# Altium PCB Master - OLD.PcbDoc (part 3 of 3)
Units mm, origin at the board's own origin, x right, y up, seen from the top; angles counter-clockwise.
Board outline 154.8 x 60 mm, 4 copper layers (Top Layer, GND-Layer, PWR-Layer, Bottom Layer), stack 1.57 mm thick; 131 components, 96 nets, 448 pads, 522 vias.
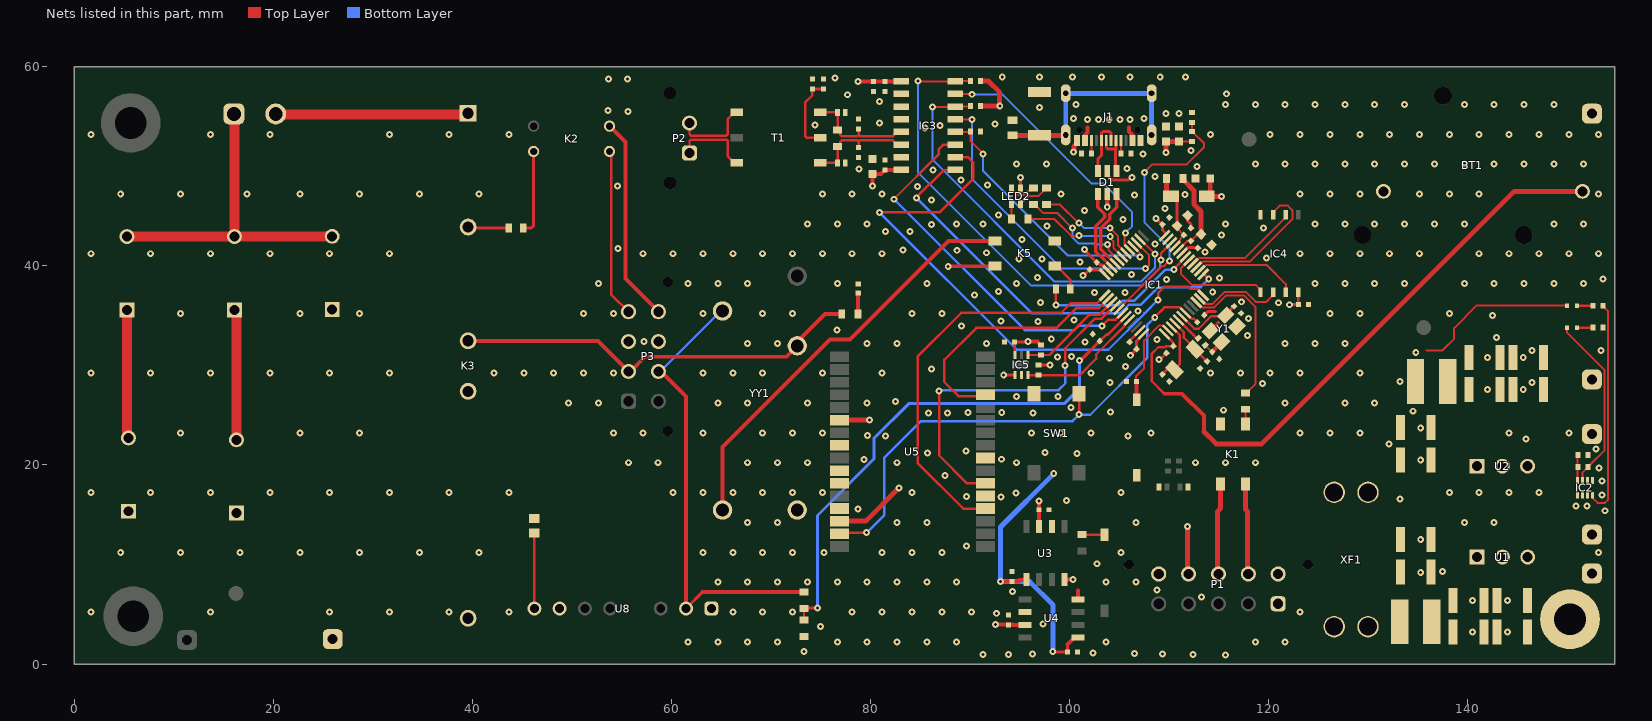
[diagram p4: the nets of this part, all layers, seen from the top]

## Via types
v1: diameter 0.7, hole 0.3, Top Layer to Bottom Layer, 522 vias

## Nets (pads, with @x,y where several pads share a name; then routed paths per layer and width w, separated by ;. In a path a pad name is that pad's centre, name@x,y a point inside that pad or via, vN(x,y) a via of type N, cw(c..) or ccw(c..) an arc to the next point about the centre after c; other vN are vias at no path point) (continued)
FLASH_IO0: IC1.17 IC4.5 | length 10.6
  Top Layer w0.2: IC1.17@112.027,40.566 111.2,39.739 111.2,39.2 112.3,38.1 118.7,38.1 119.074,37.726 119.074,37.469 IC4.5@119.199,37.344
FLASH_IO1: IC1.16 IC4.2 | length 11.5
  Top Layer w0.2: IC1.16@112.381,40.213 112.451,40.213 113.038,40.8 117.645,40.8 121.739,44.894 IC4.2@121.739,45.144
FLASH_IO2: IC1.15 IC4.3 | length 15.2
  Top Layer w0.2: IC1.15@112.734,39.859 112.805,39.859 113.396,40.45 118.15,40.45 122.4,44.7 122.4,45.6 121.95,46.05 121.125,46.05 120.469,45.394 IC4.3@120.469,45.144
FLASH_IO3: IC1.14 IC4.7 | length 10.5
  Top Layer w0.2: IC1.14@113.088,39.506 113.138,39.506 113.732,40.1 119.8,40.1 121.739,38.161 IC4.7@121.739,37.344
FLASH_SCK: IC1.11 IC4.6 | length 9.1
  Top Layer w0.2: IC1.11@113.088,36.694 113.609,36.173 113.751,36.173 113.753,36.17 114.37,36.17 115.6,37.4 117.7,37.4 118.7,36.4 119.8,36.4 120.344,36.944 120.344,37.219 IC4.6@120.469,37.344
GND: BT1.2 C1.1 C2.1 C3.1 C4.1 C5.1 C6.1 C7.1 C8.1 C9.1 C10.2 C11.1 C12.1 C13.1 C14.1 C15.1 C16.1 C17.1 C18.2 C19.1 C20.1 C21.1 C22.1 C23.1 C24.1 C25.2 C26.1 C27.1 C28.1 C29.1 C30.1 C31.1 C32.1 C33.1 C34.2 C35.1 C36.1 C37.1 C38.1 C39.1 C40.1 C41.1 C42.1 C43.1 C44.1 C47.1 D1.2 D2.2 D3.1 D4.1 D5.1 IC1.19 IC1.23 IC1.35 IC1.47 IC2.1 IC3.10 IC3.11 IC3.12 IC3.15 IC4.4 IC5.5 J1.A1/B12 J1.A12/B1 K1.2 K3.5 K5.2 LED4.1 P1.1 P1.10 P3.3 P3.7 pad.5@150.3,4.5 R5.1 R6.1 R12.1 R20.2 R21.1 R22.1 R24.1 R32.1 SW1.B1 SW3.2 TP4.1 U1.2 U2.2 U3.2 U3.8 U4.2 U4.8 U5.5 U5.8 U5.24 U5.26 U5.27 U5.29 U8.1 Y1.2 Y1.4 YY1.1 | length 16
  Top Layer w0.3: v1(101.5,41.65) 101.5,41.607 C26.1@102.754,40.353 102.859,40.353 103.133,40.08 103.338,40.08 IC1.35@103.912,39.506 ; C28.1@106.047,32.382 106.047,32.465 IC1.47@107.094,33.512 ; v1(109,30.6) 109.1,30.6 C29.1@109.746,31.247 ; IC1.19@111.32,41.273 111.894,41.848 112.718,41.848 112.766,41.8 C17.1@112.907,41.8 ; C10.2@111.884,45.084 111.884,44.516 112.207,44.193 C9.1@112.207,43.807 ; C1.1@113.554,35.053 113.9,35.4 114.7,35.4
  Top Layer w0.4: U3.8@99.5,8.5 v1@100.4,8.5 ; U4.8@100.85,6.48 100.85,7.375 ; Y1.4@114.156,33.488 114.954,34.285
  Top Layer w0.5: v1(100.4,51.45) 100.438,51.488 100.438,52.018 100.75,52.33 J1.A12/B1@100.75,52.6 ; v1(103.8,45.9) D1.2@103.8,47.25
  other v1: 115.7,0.9 91.325,0.95 93.875,0.975 112.425,0.975 96.275,1 109.375,1 106.55,1.075 102.35,1.1 73.325,1.25 61.675,2.225 64.675,2.225 67.675,2.225 70.675,2.225 76.675,2.225 79.675,2.225 82.675,2.225 85.675,2.225 88.675,2.225 103.675,2.225 118.675,2.225 121.675,2.225 140.5,3.2 144,3.2 75,3.775 97.325,4.025 92.65,5.1 66.175,5.225 69.175,5.225 72.175,5.225 78.175,5.225 81.175,5.225 84.175,5.225 87.175,5.225 90.175,5.225 123.175,5.225 140.5,6.4 144,6.4 113.25,6.725 94.275,7.275 108.8,7.425 64.675,8.225 67.675,8.225 70.675,8.225 73.675,8.225 76.675,8.225 79.675,8.225 82.675,8.225 85.675,8.225 88.675,8.225 103.675,8.225 106.675,8.225 100.345,8.5 135.3,9.2 137.5,9.3 102.775,10.075 63.175,11.225 66.175,11.225 69.175,11.225 72.175,11.225 75.325,11.225 81.175,11.225 84.175,11.225 87.175,11.225 105.175,11.225 153.175,11.225 89.675,11.875 135.3,12.5 67.675,14.225 70.675,14.225 82.675,14.225 85.675,14.225 106.675,14.225 139.675,14.225 142.675,14.225 153.8,15.4 78.775,15.575 99.725,16.425 93.125,16.8 89.65,16.85 94.65,17.2 60.175,17.225 63.175,17.225 66.175,17.225 69.175,17.225 72.175,17.225 75.175,17.225 84.175,17.225 105.175,17.225 138.175,17.225 141.175,17.225 144.175,17.225 147.175,17.225 87.475,18.925 153.2,19.7 55.675,20.225 58.675,20.225 67.675,20.225 70.675,20.225 73.675,20.225 82.675,20.225 94.675,20.225 112.675,20.225 115.675,20.225 118.675,20.225 135.3,20.5 79.364,20.536 93.175,20.575 100.775,21.175 85.75,21.225 97.55,21.25 89.6,21.425 152.9,21.6 81.51,22.89 105.875,22.925 79.7,22.975 54.175,23.225 57.175,23.225 63.175,23.225 69.175,23.225 72.175,23.225 75.175,23.225 96.175,23.225 99.175,23.225 102.175,23.225 108.175,23.225 123.175,23.225 126.175,23.225 129.175,23.225 144.175,23.225 150.175,23.225 135.3,23.7 87.75,25.2 96.325,25.2 85.85,25.225 89.825,25.25 93.2,25.25 104.15,25.3 115.5,25.5 100.175,25.775 49.675,26.225 52.675,26.225 64.675,26.225 67.675,26.225 73.675,26.225 79.675,26.225 121.675,26.225 127.675,26.225 130.675,26.225 82.506,26.394 98.875,26.875 94.675,26.899 142,27.6 145.6,27.6 119.4,28.2 104.075,28.275 42.175,29.225 45.175,29.225 48.175,29.225 51.175,29.225 54.175,29.225 63.175,29.225 66.175,29.225 69.175,29.225 75.175,29.225 81.175,29.225 102.175,29.225 114.175,29.225 117.175,29.225 120.175,29.225 123.175,29.225 129.175,29.225 86.125,29.65 105.625,29.9 104.05,30.725 142,30.8 145.6,30.8 98.825,30.85 100.225,30.9 153.4,31.5 67.675,32.225 70.675,32.225 79.675,32.225 82.675,32.225 91.675,32.225 121.675,32.225 124.675,32.225 127.675,32.225 101.55,32.375 57.25,32.425 108.8,32.6 98.175,32.65 142.9,32.8 117.9,33 76.65,33.55 89.175,33.975 96.825,34.425 93.125,34.45 100.475,34.55 118,34.7 142.5,35 51.175,35.225 54.175,35.225 63.175,35.225 69.175,35.225 72.175,35.225 84.175,35.225 87.175,35.225 120.175,35.225 126.175,35.225 129.175,35.225 138.175,35.225 106.903,35.458 121,36.3 97.075,36.325 117.3,36.4 90.475,37.1 102.525,37.325 105.575,37.35 114.4,37.375 92.875,37.45 52.675,38.225 61.675,38.225 64.675,38.225 67.675,38.225 76.675,38.225 85.675,38.225 94.675,38.225 124.675,38.225 127.675,38.225 130.675,38.225 133.675,38.225 139.675,38.225 142.675,38.225 145.675,38.225 148.675,38.225 151.675,38.225 109.775,38.65 153.6,38.7 115.1,38.8 96.8,38.825 106.25,39.12 101.075,40.4 94.95,40.675 97.225,40.7 119.8,40.8 57.175,41.225 60.175,41.225 63.175,41.225 66.175,41.225 69.175,41.225 72.175,41.225 75.175,41.225 78.175,41.225 81.175,41.225 123.175,41.225 126.175,41.225 129.175,41.225 132.175,41.225 135.175,41.225 141.175,41.225 144.175,41.225 147.175,41.225 150.175,41.225 153.175,41.225 91.65,41.325 113.6,41.4 88.7,41.575 83.3,41.6 54.625,41.775 108.6,42.2 95.25,42.675 115.3,43.1 81.5,43.45 84,43.475 119.5,43.8 97.724,44.024 86.15,44.15 91.3,44.2 73.675,44.225 76.675,44.225 79.675,44.225 88.675,44.225 115.675,44.225 124.675,44.225 127.675,44.225 130.675,44.225 133.675,44.225 136.675,44.225 139.675,44.225 148.675,44.225 151.675,44.225 105.4,44.65 92.85,45.1 101.5,45.55 109.6,45.75 86.15,46.625 106.55,47.15 111.6,47.2 75.175,47.225 78.175,47.225 81.175,47.225 99.175,47.225 123.175,47.225 126.175,47.225 129.175,47.225 135.175,47.225 138.175,47.225 141.175,47.225 153.175,47.225 84.725,48 54.577,48.05 91.75,48.125 89.124,48.649 108.6,49 86.3,49.625 78.875,49.75 105.8,49.8 112.8,49.975 94.675,50.225 97.675,50.225 118.675,50.225 121.675,50.225 124.675,50.225 127.675,50.225 130.675,50.225 133.675,50.225 136.675,50.225 139.675,50.225 142.675,50.225 145.675,50.225 148.675,50.225 151.675,50.225 107.4,51.225 112.2,51.6 114.175,53.225 120.175,53.225 123.175,53.225 126.175,53.225 129.175,53.225 132.175,53.225 135.175,53.225 138.175,53.225 141.175,53.225 144.175,53.225 147.175,53.225 150.175,53.225 153.175,53.225 85.475,53.875 87,54.1 74.425,54.15 92.525,54.25 80.925,54.375 100.4,54.8 107.5,54.8 109.7,55.3 111,55.3 55.65,55.5 53.65,55.6 97,55.9 100.675,56.225 115.675,56.225 118.675,56.225 121.675,56.225 124.675,56.225 127.675,56.225 130.675,56.225 133.675,56.225 139.675,56.225 142.675,56.225 145.675,56.225 148.675,56.225 80.9,56.5 77.7,57.2 115.8,57.3 53.7,58.8 55.6,58.8 76.425,58.875 111.65,58.975 93.25,59 97,59 100.3,59 103.2,59 106.1,59 109.125,59
GND_HV: K3.7 R25.2 RT3.1 RT4.1 RT5.1 TP7.1 U8.7
  other v1: 1.675,5.225 13.675,5.225 25.675,5.225 31.675,5.225 37.675,5.225 43.675,5.225 4.675,11.225 10.675,11.225 16.675,11.225 22.675,11.225 28.675,11.225 34.675,11.225 40.675,11.225 1.675,17.225 7.675,17.225 13.675,17.225 19.675,17.225 25.675,17.225 31.675,17.225 37.675,17.225 43.675,17.225 10.675,23.225 22.675,23.225 28.675,23.225 1.675,29.225 7.675,29.225 13.675,29.225 19.675,29.225 25.675,29.225 31.675,29.225 10.675,35.225 22.675,35.225 28.675,35.225 1.675,41.225 7.675,41.225 13.675,41.225 19.675,41.225 25.675,41.225 31.675,41.225 4.675,47.225 10.675,47.225 17.35,47.225 22.675,47.225 28.675,47.225 34.675,47.225 40.675,47.225 1.675,53.225 13.675,53.225 19.675,53.225 31.675,53.225 37.675,53.225 43.675,53.225
HSE_OSC_IN: IC1.5 R1.1 | length 2.7
  Top Layer w0.25: IC1.5@110.966,34.573 112.786,32.754 R1.1@112.946,32.754
HSE_OSC_OUT: C3.2 IC1.6 Y1.3 | length 6.7
  Top Layer w0.25: IC1.6@111.32,34.927 112.554,33.692 112.992,33.692 114.255,34.955 115.624,34.955 Y1.3@115.712,35.044 Y1.3@115.712,35.119
  Top Layer w0.3: Y1.3@115.712,35.119 C3.2@116.546,35.954
I2C_SCL: IC1.39 IC5.1 R29.1 | length 10.6
  Top Layer w0.25: IC5.1@95.825,31.05 97.15,31.05 97.984,31.05 102.034,35.1 103.025,35.1 IC1.39@104.266,36.341
I2C_SDA: IC1.44 IC5.6 R30.1 | length 12.8
  Top Layer w0.25: IC5.6@95.825,29.05 95.85,29.025 R30.1@96.9,29.025 ; R30.1@96.9,29 101,29 102.695,30.695 102.695,31.128 105.55,33.983 105.55,34.054 106.034,34.538 IC1.44@106.034,34.573
ISO_RELAY+: K1.4 P1.7 | length 9.1
  Top Layer w0.5: K1.4@117.7,18.1 117.7,15.54 117.89,15.35 P1.7@117.89,9.05
ISO_RELAY-: K1.3 P1.8 | length 9.2
  Top Layer w0.5: P1.8@114.89,9.05 114.89,15.35 115.16,15.62 K1.3@115.16,18.1
LED_B: IC1.32 R19.1 | length 11.7
  Top Layer w0.2: R19.1@96.4,46.173 96.5,46.173 97.373,45.3 98.8,45.3 v1(100.3,43.8) ; v1(103.823,42.146) 103.918,42.051 103.918,41.621 IC1.32@104.973,40.566
  Bottom Layer w0.2: v1(100.3,43.8) 100.3,42.9 100.95,42.25 102.419,42.25 102.523,42.146 v1(103.823,42.146)
LED_G: IC1.31 R18.1 | length 11.6
  Top Layer w0.2: R18.1@95.827,44.7 98.5,44.7 100.221,42.979 100.879,42.979 v1(100.974,43.074) ; v1(104.101,42.949) 104.101,42.814 104.423,42.493 104.423,41.824 IC1.31@105.327,40.92
  Bottom Layer w0.2: v1(100.974,43.074) 101.037,43.012 104.039,43.012 v1(104.101,42.949)
LED_R: IC1.30 R17.1 | length 10.6
  Top Layer w0.2: R17.1@97.7,46.173 99.027,46.173 100.869,44.331 v1(100.964,44.331) ; v1(104.1,43.799) 104.9,42.999 104.9,42.054 IC1.30@105.68,41.273
  Bottom Layer w0.2: v1(100.964,44.331) 101.495,43.799 v1(104.1,43.799)
LSE_OSC_IN: C4.2 IC1.3 Y2.1 | length 6.1
  Top Layer w0.25: Y2.1@110.184,29.999 Y2.1@110.408,29.999 ; IC1.3@110.259,33.866 111.082,33.043 111.082,30.143 110.55,29.611 Y2.1@110.55,29.575
  Top Layer w0.3: C4.2@109.464,29.254 Y2.1@110.209,29.999
LSE_OSC_OUT: C5.2 IC1.4 Y2.2 | length 5.1
  Top Layer w0.25: IC1.4@110.613,34.219 111.491,33.341 111.491,32.795 112.6,31.686 Y2.2@112.6,31.625
  Top Layer w0.3: Y2.2@112.6,31.625 C5.2@113.825,30.4
MC_EN: IC1.28 IC3.4 R12.2 | length 26.8
  Top Layer w0.2: IC3.4@88.524,53.47 90.045,53.47 R12.2@90.075,53.5 90.075,52.509 v1(91.333,51.251) ; IC1.28@106.387,41.981 107.05,41.318 107.05,40.925 v1(107.1,40.875)
  Bottom Layer w0.2: v1(91.333,51.251) 91.31,51.228 91.31,49.59 99.85,41.05 106.79,41.05 106.965,40.875 v1(107.1,40.875)
MC_INT: IC1.22 IC3.8 R9.1 | length 47.3
  Top Layer w0.2: v1(84.775,58.599) 84.824,58.55 IC3.8@88.524,58.55 88.549,58.575 R9.1@90.05,58.575 ; v1(109.2,40.611) 109.2,41.275 IC1.22@110.259,42.334
  Bottom Layer w0.2: v1(84.775,58.599) 84.775,49.425 96.175,38.025 107.288,38.025 109.105,39.841 109.105,40.516 v1(109.2,40.611)
MC_RX_MOSI: IC1.29 IC3.7 | length 27
  Top Layer w0.2: IC3.7@88.524,57.28 90.17,57.28 v1(90.2,57.25) ; v1(105.625,43.325) 105.625,43.19 105.51,43.074 105.51,42.222 106.034,41.698 IC1.29@106.034,41.627
  Bottom Layer w0.2: v1(90.2,57.25) 93.25,57.25 102.2,48.3 103.4,48.3 106.302,45.398 106.302,44.002 v1(105.625,43.325)
MC_RX_NSS: IC1.26 IC3.6 R10.1 | length 40.6
  Top Layer w0.2: v1(86.25,55.975) 88.489,55.975 88.541,56.027 90.023,56.027 R10.1@90.05,56 ; IC1.26@107.094,42.688 108.572,41.21 v1(108.597,41.21)
  Bottom Layer w0.2: v1(86.25,55.975) 86.25,50.675 98.5,38.425 107.193,38.425 108.6,39.832 108.6,41.207 v1(108.597,41.21)
MC_RX_SCK: IC1.27 IC3.5 | length 32.1
  Top Layer w0.2: IC3.5@88.524,54.74 89.287,54.74 89.302,54.725 v1(90.2,54.725) ; IC1.27@106.741,42.334 108,41.075 108,40.087 107.639,39.726 v1(107.639,39.72)
  Bottom Layer w0.2: v1(90.2,54.725) 90.2,48.75 99.23,39.72 v1(107.639,39.72)
MC_TX_MOSI: IC1.42 IC3.3 | length 37.9
  Top Layer w0.25: v1(82.35,46.7) 86.85,51.2 86.85,51.7 87.35,52.2 IC3.3@88.524,52.2 ; v1(103.275,33.975) 103.9,34.6 104.646,34.6 IC1.42@105.327,35.28
  Bottom Layer w0.25: v1(82.35,46.7) 82.375,46.7 95.525,33.55 100.484,33.55 100.909,33.975 v1(103.275,33.975)
MC_TX_NSS: IC1.12 IC3.2 | length 56.1
  Top Layer w0.25: v1(80.925,45.375) 86.95,45.375 90.325,48.75 90.325,50.404 89.799,50.93 IC3.2@88.524,50.93 ; v1(108.9,36.6) 108.941,36.641 108.941,37.325 109.541,37.925 111.945,37.925 112.145,37.725 112.764,37.725 IC1.12@113.441,37.048
  Bottom Layer w0.25: v1(80.925,45.375) 94.725,31.575 103.903,31.575 107.528,35.2 107.528,35.228 v1(108.9,36.6)
MC_TX_SCK: IC1.13 IC3.1 | length 41.5
  Top Layer w0.25: v1(84.65,46.824) 84.65,46.925 87.333,49.608 88.472,49.608 IC3.1@88.524,49.66 ; IC1.13@113.441,39.152 113.477,39.188 113.512,39.188 v1(114,38.7)
  Bottom Layer w0.25: v1(84.65,46.824) 96.249,35.225 105.1,35.225 105.958,36.083 107.158,36.083 108.95,37.875 113.175,37.875 v1(114,38.7)
NetC8_2: C8.2 J1.Shell R6.2 | length 22.3
  Top Layer w0.5: R6.2@94.325,53.125 99.585,53.125 J1.Shell@99.63,53.17
  Bottom Layer w0.5: J1.Shell@99.63,53.17 J1.Shell@99.63,57.35 J1.Shell@108.27,57.35 J1.Shell@108.27,53.17
NetC13_2: C13.2 C14.2 L1.2 U1.1
NetC21_2: C21.2 C22.2 L2.2 U2.1
NetC35_2: C35.2 C36.2 T1.5 | length 7.7
  Top Layer w0.25: C36.2@74.175,57.8 74.175,57.153 73.45,56.428 73.45,53.046 73.596,52.9 T1.5@74.965,52.9
  Top Layer w0.3: C36.2@74.175,57.8 C35.2@75.275,57.8
NetD1_4: D1.4 J1.A7 J1.B7 | length 4.8
  Top Layer w0.3: J1.A7@103.7,52.6 103.7,51.906 103.876,51.73 104.644,51.73 104.65,51.724 ; J1.B7@104.7,52.6 104.7,51.774 104.65,51.724 ; D1.4@104.75,49.55 104.65,49.65 104.65,51.724
NetD1_6: D1.6 J1.A6 J1.B6 | length 5.8
  Top Layer w0.3: D1.6@102.85,49.55 102.85,50.75 103.2,51.1 103.2,53.324 103.376,53.5 104.024,53.5 104.2,53.324 J1.A6@104.2,52.6
NetJ1_A5: J1.A5 R5.2 | length 1.3
  Top Layer w0.2: R5.2@105.2,51.3 J1.A5@105.2,52.6
NetJ1_B5: J1.B5 R21.2 | length 1.3
  Top Layer w0.2: R21.2@102.2,51.3 J1.B5@102.2,52.6
NetK1_1: K1.1 R14.2 | length 1.5
  Top Layer w0.2: K1.1@117.7,24.1 R14.2@117.7,25.6
NetK2_2: K2.2 R26.1 | length 8.6
  Top Layer w0.3: R26.1@45.1,43.825 45.954,43.825 46.165,44.036 K2.2@46.165,51.505
NetK3_2: K3.2 R26.2 | length 4.1
  Top Layer w0.3: K3.2@39.577,43.908 K3.2@39.575,43.91 39.66,43.825 R26.2@43.65,43.825
NetK5_1: K5.1 R28.2 | length 3
  Top Layer w0.25: K5.1@98.525,39.98 98.725,39.98 100.1,38.605 R28.2@100.1,37.7
NetLED1_1: LED1.1 R8.2 | length 1.6
  Top Layer w0.25: LED1.1@151,36 R8.2@152.6,36
NetLED2_1: LED2.1 R17.2 | length 3.5
  Top Layer w0.2: LED2.1@95.1,46.2 95.1,46.35 95.25,46.5 95.4,46.5 95.938,47.038 96.912,47.038 R17.2@97.7,47.827 R17.2@97.8,47.827
NetLED2_2: LED2.2 R18.2 | length 1.3
  Top Layer w0.2: R18.2@94.173,44.9 94.2,44.927 LED2.2@94.2,46.2
NetLED2_3: LED2.3 R19.2 | length 2.8
  Top Layer w0.2: LED2.3@94.2,47.8 94.2,47.65 94.35,47.5 94.396,47.5 94.746,47.15 95.5,47.15 95.927,47.577 96.15,47.577 R19.2@96.4,47.827
NetLED3_1: LED3.1 R22.2 | length 1.6
  Top Layer w0.25: LED3.1@151,33.8 R22.2@152.6,33.8
NetLED4_2: LED4.2 R31.1 | length 2.1
  Top Layer w0.4: R31.1@78.775,35.15 LED4.2@78.775,37.27
NetR13_2: R13.2 SW2.1 | length 2.3
  Top Layer w0.248: R13.2@101.25,12.927 101.308,12.985 SW2.1@103.525,12.985
NetR25_1: R25.1 U8.8 | length 7.6
  Top Layer w0.25: U8.8@46.235,5.575 R25.1@46.235,13.15
NetRT1_1: RT1.1 RT4.2 | length 12.9
  Top Layer w1: RT4.2@16.3,22.529 RT1.1@16.3,35.388
NetRT2_1: RT2.1 RT5.2 | length 12.7
  Top Layer w1: RT5.2@5.3,22.867 RT2.1@5.3,35.584
NRST: C1.2 IC1.7 SW1.A1 U5.31 | length 54
  Top Layer w0.25: U5.31@76.305,13.201 79.576,13.201 v1(79.6,13.225) ; SW1.A1@100.95,27.175 100.975,27.15 v1(100.975,25.05) ; v1(108.575,34.825) 108.575,34.853 109.551,35.829 111.089,35.829 111.638,35.28 111.709,35.28 112.289,34.7 112.493,34.7 C1.2@112.846,34.346
  Bottom Layer w0.25: v1(79.6,13.225) 79.675,13.225 81.375,14.925 81.375,20.7 85.075,24.4 100.325,24.4 v1(100.975,25.05) 102.089,25.05 107.8,30.761 107.8,34.05 v1(108.575,34.825)
p3v3: C23.2 C24.2 C25.1 C26.2 C27.2 C28.2 C30.2 C31.2 C38.2 C40.2 C42.2 C43.2 FB1.1 IC1.24 IC1.36 IC1.48 IC3.9 IC4.8 IC5.3 IC5.4 P1.9 R9.2 R10.2 R29.2 R30.2 TP3.1 U2.3 U3.5 U4.5 U5.30 | length 72.1
  Top Layer w0.25: IC5.3@94.525,31.05 C43.2@94.525,32.325 ; C42.2@123.009,36.228 IC4.8@123.009,37.344
  Top Layer w0.3: v1(93.4,29.025) 93.413,29.038 94.525,29.038 IC5.4@94.525,29.05 ; C43.2@94.525,32.325 C43.2@94.475,32.375 95.8,32.375 v1(95.825,32.4) ; R30.2@96.9,30.025 98.025,30.025 v1(98.05,30.05) ; R29.2@97,32.174 97,32.1 R29.2@97.175,32.1 ; v1@98.35,1.225 C40.2@99.775,1.225 ; C40.2@99.8,1.175 99.8,1.97 ; v1(101.35,39.025) 101.388,39.025 102.009,39.646 C26.2@102.046,39.646 ; C26.2@102.188,39.646 102.234,39.6 103.111,39.6 IC1.36@103.559,39.152 ; v1(106.117,31.024) 106.131,31.024 C28.2@106.754,31.646 106.754,32.465 IC1.48@107.448,33.159 ; v1(108.7,44.75) 108.734,44.75 109.313,44.171 C27.2@109.346,44.171 109.346,43.606 109.732,43.221 IC1.24@109.552,43.041 ; v1(122.1,36.1) 122.144,36.144 C42.2@123.004,36.144
  Top Layer w0.4: v1(78.75,58.55) 80.075,58.55 ; C30.2@80.325,58.55 C31.2@81.475,58.55 82.337,58.55 IC3.9@83.1,58.55 ; v1@93.1,8.3 C38.2@94.25,8.3 94.875,8.3 95.004,8.429 95.574,8.429 U3.5@95.67,8.525 ; v1(95.825,32.4) 96.774,32.4 R29.2@97,32.174 ; v1(98.325,1.25) v1@98.35,1.225 ; C40.2@99.775,1.225 C40.2@99.8,1.2 ; 99.8,1.97 100.4,2.57 100.5,2.67 U4.5@100.85,2.67
  Top Layer w0.5: U5.30@76.91,14.35 79.525,14.35 v1(82.875,17.7) ; C30.2@80.075,58.55 C30.2@80.325,58.55 ; R10.2@91.05,56.05 v1(93,56.05) 92.985,56.065 92.985,57.44 91.85,58.575 R9.2@91.05,58.575 ; P1.9@111.87,9.05 v1(111.875,13.825) ; C25.1@114.15,48.8 114.15,47.35 FB1.1@113.8,47 v1(115.3,47)
  Bottom Layer w0.5: v1@98.363,1.149 98.363,5.937 96.025,8.275 v1(93.075,8.275) 93.075,13.775 v1(98.425,19.125)
  other v1: 145.9,22.6 146.5,28.3 146.5,31.5
p3v3A: C9.2 C10.1 FB1.2 IC1.21 R7.2 | length 8
  Top Layer w0.2: IC1.21@110.613,41.981 110.613,42.051 111.182,42.62 111.182,42.782 C9.2@111.5,43.1 110.823,43.777 C10.1@110.823,44.023
  Top Layer w0.3: FB1.2@110.2,47 110.373,47 110.823,46.55 C10.1@110.823,44.023
  Top Layer w0.5: R7.2@109.773,48.8 109.773,47.35 FB1.2@110.123,47
p3v3Ref: C17.2 C18.1 IC1.20 R7.1 | length 9.3
  Top Layer w0.2: IC1.20@110.966,41.627 111.847,42.507 C17.2@112.2,42.507 112.877,43.184 C18.1@113.223,43.184
  Top Layer w0.5: R7.1@111.427,48.8 111.527,48.7 111.527,48.557 112.5,47.584 112.5,46.2 113.223,45.477 C18.1@113.223,43.184
p5v0: C19.2 C20.2 C32.2 C33.2 C39.2 IC2.2 IC2.7 IC3.16 K5.4 L2.1 LED1.2 LED2.4 TP2.1 U3.3 | length 29.2
  Top Layer w0.2: K5.4@92.497,39.952 K5.4@92.525,39.98 ; 135.856,31.5 137.45,31.5 138.65,32.7 138.65,33.75 140.9,36 LED1.2@150,36
  Top Layer w0.3: v1(95.075,48.875) 95.087,48.863 95.087,47.813 LED2.4@95.1,47.8
  Top Layer w0.35: v1(87.823,39.952) K5.4@92.497,39.952
  Top Layer w0.4: v1(80.2,48.05) 80.2,48.825 80.225,48.85 C33.2@80.225,49.25 81.075,49.25 C32.2@81.475,49.65 ; C32.2@81.485,49.66 IC3.16@83.1,49.66 ; v1(96.925,16.4) 96.937,16.388 96.937,15.312 C39.2@96.95,15.3 ; U3.3@96.94,13.825 C39.2@96.94,15.29
  other v1: 133.2,16.6 153.5,17 153.5,18.4 132.1,22.1 134.5,25.4 133.2,28.4 134.8,31.3
p5v0_PS: C15.2 C16.2 IC2.3 IC2.5 LED3.2 R23.2 U1.3 | length 17.8
  Top Layer w0.2: LED3.2@150,33.8 150,33.3 153.75,29.55 153.75,21.45 152.3,20 152.25,20 152.1,19.85 152.1,19.75 151.55,19.2 IC2.3@151.55,18.538
p5v0_ST: C41.2 U4.3 U5.22 | length 6
  Top Layer w0.4: v1(92.575,3.95) 94.05,3.95 94.3,3.95 94.31,3.94 U4.3@95.55,3.94
  Top Layer w0.5: U5.22@76.91,24.51 79.91,24.51 v1(79.925,24.525)
p5v0_USB: C6.2 C7.2 D1.5 IC2.6 J1.A4/B9 J1.A9/B4 R4.1 TP5.1 | length 9.8
  Top Layer w0.2: C6.2@111,52.5 112,52.5 R4.1@112.3,52.5
  Top Layer w0.3: D1.5@103.8,49.55 103.95,49.4 103.95,48.95 104.25,48.65 105.942,48.65 106.192,48.9 v1(106.3,48.9)
  Top Layer w0.4: J1.A9/B4@101.55,52.6 101.55,53.17 101.8,53.42 101.8,53.9 ; 106,53.9 106,53.52 106.35,53.17 J1.A4/B9@106.35,52.6
  Top Layer w0.5: v1(109.7,51.4) C7.2@109.7,52.5 C6.2@111,52.5
  other v1: 150.9,15.9 152,15.9 101.8,54.7 102.9,54.7 104,54.7 105.1,54.7 106.1,54.7
p24v0: C11.2 C12.2 L1.1 TP1.1 XF1.3 XF1.4
pBat: BT1.1 C29.2 IC1.1 | length 64.2
  Top Layer w0.25: 109.55,27.15 108.286,28.414 108.286,31.186 108.925,31.825 109.582,31.825 109.633,31.875 109.651,31.875 109.729,31.954 C29.2@110.454,31.954 110.454,32.257 IC1.1@109.552,33.159
  Top Layer w0.35: 109.55,27.15 111.325,27.15
  Top Layer w0.4: 111.325,27.15 113.525,24.95 113.525,23.35
  Top Layer w0.5: 113.525,23.35 114.75,22.125 119.325,22.125 144.7,47.5 BT1.1@151.55,47.5
PC_Mech_State: K2.3 P3.4 | length 17
  Top Layer w0.254: K2.3@53.785,51.505 53.95,51.34 53.95,37.15 P3.4@55.775,35.325
PC_SIG: K3.3 P3.2 R31.2 YY1.2 | length 41.4
  Top Layer w0.254: P3.2@55.7,29.4 P3.2@55.9,29.4 ; YY1.2@72.672,31.953 YY1.2@72.672,32.386
  Top Layer w0.4: K3.3@39.575,32.48 52.62,32.48 P3.2@55.7,29.4 ; P3.2@55.9,29.4 57.375,30.875 71.55,30.875 YY1.2@72.65,31.975 ; YY1.2@72.672,32.386 75.436,35.15 R31.2@77.123,35.15
PCC_ACT: IC1.18 R28.1 | length 16.8
  Top Layer w0.25: v1(98.65,36.075) R28.1@98.65,37.7 ; v1(110.499,39.633) 110.499,39.71 111.673,40.885 IC1.18@111.673,40.92
  Bottom Layer w0.25: v1(98.65,36.075) 98.7,36.025 104.875,36.025 105.333,36.483 106.508,36.483 109.658,39.633 v1(110.499,39.633)
PCC_COIL+: K5.3 YY1.5 | length 42.3
  Top Layer w0.4: YY1.5@65.15,15.475 65.15,21.825 75.925,32.6 77.934,32.6 87.854,42.52 K5.3@92.525,42.52
PR1: IC2.4 R23.1 R24.2 | length 2.5
  Top Layer w0.2: IC2.4@151.05,18.538 151.05,20.95 R24.2@151.1,21
pVin: P1.6 XF1.1 XF1.2
RDTX_N: C37.2 D3.2 IC3.13 R11.1 T1.6 | length 11.2
  Top Layer w0.25: T1.6@74.98,55.425 D3.2@76.675,55.425 ; D3.2@76.6,55.425 76.7,55.325 R11.1@76.7,53.652 76.752,53.652 76.977,53.427 76.977,53.171 77.123,53.025 77.722,53.025 78.666,53.025 78.813,53.171 ; C37.2@78.8,53.75 78.813,53.737 78.813,53.171 ; IC3.13@83.1,53.47 82.663,53.47 82.218,53.025 78.913,53.025 78.913,53.071 78.813,53.171
RDTX_P: C34.1 D2.1 IC3.14 R11.2 T1.4 | length 11.1
  Top Layer w0.25: T1.4@74.975,50.35 D2.1@76.675,50.35 76.7,50.375 R11.2@76.7,51.998 76.752,51.998 76.977,52.223 76.977,52.479 77.123,52.625 77.556,52.625 78.666,52.625 78.813,52.479 ; C34.1@78.825,51.9 78.813,51.912 78.813,52.479 ; IC3.14@83.1,52.2 82.663,52.2 82.238,52.625 78.913,52.625 78.813,52.525 78.813,52.479
RELAY: IC1.10 R14.1 | length 16.3
  Top Layer w0.2: IC1.10@112.734,36.341 113.256,35.819 113.397,35.819 113.4,35.817 114.512,35.817 115.745,37.05 117.5,37.05 118.7,35.85 118.7,28.154 117.8,27.254 R14.1@117.7,27.254
SDC: P3.6 R33.2 U8.2 YY1.4 | length 46.8
  Top Layer w0.3: U8.2@61.475,5.575 63.152,7.252
  Top Layer w0.4: P3.6@58.7,29.4 58.95,29.4 61.475,26.875 U8.2@61.475,5.575 ; 63.152,7.252 R33.2@73.325,7.252
  Bottom Layer w0.254: P3.6@58.7,29.4 P3.6@58.887,29.4 ; P3.6@59.075,29.4 P3.6@58.887,29.4 ; YY1.4@65.15,35.475 64.963,35.475 P3.6@58.887,29.4
SDC_PCC: C44.2 IC1.43 R32.2 R33.1 | length 54
  Top Layer w0.2: R32.2@73.325,4.4 R33.1@73.325,5.598
  Top Layer w0.3: R33.1@73.325,5.598 73.351,5.624 74.649,5.624 v1(74.675,5.65) ; v1(101,30.475) 101.082,30.475 C44.2@103.054,32.446 103.729,33.121 103.875,33.121 IC1.43@105.68,34.927
  Bottom Layer w0.3: v1(74.675,5.65) 74.675,14.928 80.35,20.603 80.35,22.65 83.9,26.2 99.525,26.2 101,27.675 v1(101,30.475)
ST: IC2.8 R8.1 | length 21.8
  Top Layer w0.2: IC2.8@152.55,16.862 152.6,16.812 152.6,16.675 153.075,16.2 153.8,16.2 154.125,16.525 154.125,35.425 153.6,35.95 R8.1@153.6,36
SW1_IN: C47.2 IC1.2 SW3.1 | length 9.2
  Top Layer w0.2: C47.2@106.725,28.4 106.7,28.425 106.7,28.941 107.499,29.74 107.499,32.502 109.033,34.036 109.382,34.036 IC1.2@109.906,33.512
  Top Layer w0.4: SW3.1@106.725,26.935 C47.2@106.725,28.4
SWCLK: IC1.38 U5.13 | length 25.5
  Top Layer w0.25: U5.13@90.945,27.171 90.945,27.145 90.725,26.925 89.75,26.925 88.85,26.925 87.425,28.35 87.425,30.55 90.65,33.775 98.7,33.775 100.65,35.725 102.95,35.725 103.391,36.166 103.391,36.173 IC1.38@103.912,36.694
SWDIO: IC1.37 U5.4 | length 40.8
  Top Layer w0.25: U5.4@91.55,15.62 89.33,15.62 84.75,20.2 84.75,30.9 89.15,35.3 99.175,35.3 100.125,36.25 102.761,36.25 IC1.37@103.559,37.048
SWO: IC1.40 U5.6 | length 37.2
  Top Layer w0.25: v1(86.9,27.45) 86.9,20.975 89.725,18.15 92.026,18.15 91.895,18.281 U5.6@90.945,18.281 ; v1(99.576,30.017) 99.576,31.726 102.55,34.7 103.226,34.7 104.03,35.504 104.1,35.504 104.584,35.987 IC1.40@104.619,35.987
  Bottom Layer w0.25: v1(86.9,27.45) 86.974,27.524 98.903,27.524 99.576,28.198 99.576,29.325 v1(99.576,30.017)
TPL_N: P2.2 T1.1 | length 7.8
  Top Layer w0.247: P2.2@61.825,54.35 61.825,53.243 61.97,53.098 62.701,53.098 65.532,53.098 65.677,53.243 65.677,54.786 66.33,55.44 T1.1@66.585,55.44
TPL_P: P2.1 T1.3 | length 7.9
  Top Layer w0.247: P2.1@61.825,51.35 61.825,52.557 61.97,52.701 62.866,52.701 65.532,52.701 65.677,52.557 65.677,51.014 66.33,50.36 T1.3@66.585,50.36
TS-: P4.1 RT1.2 RT2.2 RT3.2 | length 32.9
  Top Layer w1: RT2.2@5.3,42.95 15.975,42.95 16.35,42.95 RT3.2@25.896,42.95 ; RT1.2@16.1,42.954 P4.1@16.1,55.225
TSAC-: K3.1 P4.2 | length 19.1
  Top Layer w1: P4.2@20.527,55.2 25.725,55.2 39.435,55.2 K3.1@39.575,55.34
TSAL_5V: K2.4 P3.8 | length 20.7
  Top Layer w0.4: K2.4@53.785,54.045 55.375,52.455 55.375,38.725 P3.8@58.7,35.4
USB_N: D1.3 IC1.33 | length 8.3
  Top Layer w0.3: 103.8,41 103.832,41 IC1.33@104.619,40.213
  Top Layer w0.341: 103.8,41.032 103.152,41.68 103.152,43.8 104.045,44.693 104.045,45.197 104.75,45.902 D1.3@104.75,47.25
USB_P: D1.1 IC1.34 | length 8.7
  Top Layer w0.3: 103.5,40.6 103.525,40.6 IC1.34@104.266,39.859
  Top Layer w0.341: D1.1@102.85,47.25 102.85,45.902 103.554,45.197 103.554,44.897 102.661,44.003 102.661,41.439 103.5,40.6
VSENSE: IC1.41 R4.2 R20.1 | length 27
  Top Layer w0.2: IC1.41@104.973,35.634 109.35,40.011 109.538,40.011 v1(110.045,40.518) ; v1(107.528,49.388) 108.34,50.2 111.8,50.2 113.5,51.9 113.5,52.35 112.35,53.5 R4.2@112.3,53.5 R20.1@112.3,54.4
  Bottom Layer w0.2: v1(107.528,49.388) 107.528,44.377 110.045,41.86 v1(110.045,40.518)
XTAL_OUT: C2.2 R1.2 Y1.1 | length 2.4
  Top Layer w0.2: R1.2@113.654,32.046 114.17,31.53 C2.2@114.346,31.354 ; Y1.1@115.288,32.295 Y1.1@115.288,32.356
  Top Layer w0.4: C2.2@114.346,31.354 Y1.1@115.288,32.295
pads on no net: *1. *2. *3. BT1.MH1 BT1.MH2 BT1.MH3 IC5.2 IC5.7 J1.A8 J1.B8 J1.MH1 J1.MH2 P1.MH1 P1.MH2 P2.MH1 P2.MH2 P3.MH1 P3.MH2 SW1.A2 SW1.B2 T1.2 U5.1 U5.2 U5.3 U5.7 U5.11 U5.12 U5.14 U5.15 U5.16 U5.17 U5.18 U5.19 U5.20 U5.21 U5.23 U5.25 U5.28 U5.32 U8.3 U8.5

## Polygon pours and split planes (outlines as drawn)
GND on Top Layer "GND_POUR" (solid, remove dead copper, pour order 89): 37.95,0 37.95,60 154.8,60 154.8,0
pVin on Top Layer "PVIN_L01_P071" (solid, remove dead copper, pour order 71): 131.575,15.575 126.651,7.65 119.325,7.65 119.325,16.825 122.375,19.875 131.575,19.875
GND_HV on Top Layer "GND_HV_L01_P091" (solid, remove dead copper, pour order 91): 47.3,60 47.3,43.6 44.95,41.25 34.253,41.25 32.35,39.347 32.35,22.4 35.075,19.675 35.1,19.7 46.1,19.7 46.1,19.625 52.5,13.225 52.5,0.05 0.05,0.05 0,0 0,60
p5v0 on Top Layer "p5v0" (solid, remove dead copper, pour order 88): 134.8,15.6 131.6,15.6 131.6,30.4 132.9,31.7 136.039,31.7 136.4,31.339 136.4,25.5 135.3,25.5 134.8,25
p5v0_USB on Top Layer "p5v0_USB" (solid, remove dead copper, pour order 86): 152.7,15.2 150,15.2 150,16.3 150.2,16.5 151.3,16.5 151.3,17.1 151.9,17.1 151.9,16.6 152.3,16.6 152.7,16.2
p5v0_USB on Top Layer "P5V0_USB_L01_P073" (solid, remove dead copper, pour order 73): 101.06,52 101.06,55.16 101.9,56 106,56 106.84,55.16 106.84,52
p24v0 on Top Layer "P24V0_L01_P075" (solid, remove dead copper, pour order 75): 131.6,15.6 134.8,15.6 134.8,0 124.9,0 124.9,13.1 129.1,13.1
NetC13_2 on Top Layer "NETC13_2_L01_P076" (solid, remove dead copper, pour order 76): 134.8,7.2 136.975,7.2 138.7,8.925 138.7,11.4 139.5,12.2 141.32,12.2 141.7,11.82 141.7,9.6 139.8,7.7 139.8,0 134.8,0
NetC21_2 on Top Layer "NETC21_2_L01_P082" (solid, remove dead copper, pour order 82): 136.4,26.3 136.4,25.5 137.2,25.5 138.8,23.9 138.8,19.2 139.7,18.3 141.5,18.3 141.8,18.6 141.8,24.6 141.3,25.1 141.3,32.4 140.7,33 137.9,33 136.4,31.5
p3v3 on Top Layer "P3V3_L01_P083" (solid, remove dead copper, pour order 83): 151.25,25.5 152.7,26.95 152.7,30.3 151.4,31.6 149.8,33.2 147.5,33.2 146.1,31.8 146.1,23.7 145.3,22.9 145.3,18.6 145.6,18.3 146.9,18.3 149.2,20.6 149.2,24.9 149.8,25.5
p5v0 on Top Layer "p5v0_MUX" (solid, remove dead copper, pour order 84): 151.9,18.8 151.9,16.6 152.3,16.6 152.3,17.1 152.4,17.2 152.7,17.2 153.4,16.5 154,16.5 154,18.9 153.3,18.9 152.6,18.2 152.3,18.2 152.3,18.8
p5v0_PS on Top Layer "p5v0_PS" (solid, remove dead copper, pour order 85): 151.2,16.5 150.2,16.5 150,16.3 150,0 144.8,0 144.8,8.8 145.3,9.3 145.3,14 149.4,18.1 151.3,18.1 151.3,18.7 151.5,18.9 151.7,18.9 151.9,18.7 151.9,17.2 151.5,17.2 151.2,16.9
GND on Bottom Layer "GND_L04_P087" (solid, remove dead copper, pour order 87): 37.75,0 37.75,60 154.8,60 154.8,0
pVin on Bottom Layer "PVIN_L04_P070" (solid, remove dead copper, pour order 70): 131.6,15.6 128.835,11.15 119.35,11.15 119.35,16.85 122.4,19.9 131.6,19.9
GND_HV on Bottom Layer "GND_HV_L04_P077" (solid, remove dead copper, pour order 77): 47.3,60 47.3,43.6 44.95,41.25 34.253,41.25 32.35,39.347 32.35,22.4 35.075,19.675 35.1,19.7 46.1,19.7 46.1,19.625 52.475,13.25 52.475,0.05 0.05,0.05 0,0 0,60
+5V_HV on PWR-Layer (split plane): 47.337,43.6 44.987,41.25 34.337,41.25 32.387,39.3 32.387,22.475 35.162,19.7 46.137,19.7 52.338,13.5 52.338,0.51 0.51,0.51 0.51,59.49 47.193,59.49
p3v3 on PWR-Layer (split plane): 100.271,48.1 100.28,48.05 100.308,48.008 100.35,47.98 100.4,47.971 100.45,47.98 100.476,47.998 111.924,47.998 111.95,47.98 112,47.971 113.6,47.971 113.65,47.98 113.676,47.998 143.524,47.998 143.533,47.983 147.271,44.246 147.271,18.129 140.554,18.129 138.729,19.954 138.729,28.6 138.72,28.65 138.692,28.692 135.292,32.092 135.25,32.12 135.2,32.129 132.2,32.129 132.15,32.12 132.108,32.092 123.708,23.692 113.246,13.229 106.454,13.229 101.392,18.292 101.35,18.32 101.3,18.329 87.2,18.329 87.15,18.32 87.108,18.292 85.846,17.029 81.902,17.029 81.902,25.125 81.894,25.164 81.872,25.197 80.297,26.772 80.264,26.794 80.225,26.802 79.202,26.802 79.202,30.308 80.742,31.848 86.325,31.848 86.364,31.856 86.397,31.878 87.472,32.953 90.447,35.928 90.469,35.961 90.477,36 90.477,47.946 96.275,47.946 96.325,47.955 96.367,47.983 96.395,48.025 96.404,48.075 96.395,48.125 96.377,48.151 96.377,49.9 96.369,49.939 96.347,49.972 92.147,54.172 92.114,54.194 92.075,54.202 79.942,54.202 77.502,56.642 77.502,59.49 100.271,59.49
p5v0 on PWR-Layer (split plane): 77.298,56.6 77.306,56.561 77.328,56.528 79.828,54.028 79.861,54.006 79.9,53.998 92.033,53.998 96.173,49.858 96.173,48.204 90.375,48.204 90.325,48.195 90.283,48.167 90.255,48.125 90.246,48.075 90.255,48.025 90.273,47.999 90.273,36.042 87.328,33.097 86.283,32.052 80.7,32.052 80.661,32.044 80.628,32.022 79.028,30.422 79.006,30.389 78.998,30.35 78.998,26.776 78.98,26.75 78.971,26.7 78.971,9.775 78.98,9.725 78.998,9.699 78.998,4.35 79.006,4.311 79.028,4.278 81.228,2.078 81.261,2.056 81.3,2.048 96.3,2.048 96.339,2.056 96.372,2.078 96.897,2.603 96.919,2.636 96.927,2.675 96.927,6.025 96.919,6.064 96.897,6.097 95.922,7.072 95.889,7.094 95.85,7.102 83.042,7.102 81.929,8.215 81.929,16.771 85.9,16.771 85.95,16.78 85.992,16.808 87.254,18.071 101.246,18.071 106.308,13.008 106.35,12.98 106.4,12.971 113.3,12.971 113.35,12.98 113.392,13.008 123.892,23.508 132.254,31.871 135.146,31.871 138.471,28.546 138.471,19.9 138.48,19.85 138.508,19.808 140.408,17.908 140.45,17.88 140.5,17.871 147.271,17.871 147.271,16.2 147.28,16.15 147.308,16.108 148.408,15.008 148.45,14.98 148.5,14.971 152.7,14.971 152.75,14.98 152.792,15.008 152.82,15.05 152.829,15.1 152.829,18.946 153.754,19.871 154.29,19.871 154.29,11.529 150.6,11.529 150.55,11.52 150.508,11.492 146.346,7.329 126.1,7.329 126.05,7.32 126.008,7.292 123.808,5.092 123.78,5.05 123.771,5 123.771,0.51 60.513,0.51 60.513,13.45 48.387,25.575 39.2,25.575 37.937,26.838 37.937,34.2 39.2,35.462 48.162,35.462 53.056,40.356 52.889,59.49 56.275,59.49 56.275,44.2 72.538,44.2 72.538,59.49 77.298,59.49
p24v0 on PWR-Layer (split plane): 154.29,0.51 124.029,0.51 124.029,4.946 126.154,7.071 146.4,7.071 146.45,7.08 146.492,7.108 150.654,11.271 154.29,11.271
p5v0_ST on PWR-Layer (split plane): 81.698,25.083 81.698,17.026 81.68,17 81.671,16.95 81.671,8.2 81.68,8.15 81.708,8.108 81.75,8.08 81.782,8.074 82.928,6.928 82.961,6.906 83,6.898 95.808,6.898 96.723,5.983 96.723,2.717 96.258,2.252 81.342,2.252 79.202,4.392 79.202,9.699 79.22,9.725 79.229,9.775 79.229,26.598 80.183,26.598
p5v0_USB on PWR-Layer (split plane): 154.29,20.129 153.7,20.129 153.65,20.12 153.608,20.092 152.608,19.092 152.58,19.05 152.571,19 152.571,15.229 148.554,15.229 147.529,16.254 147.529,18 147.529,44.3 147.52,44.35 147.492,44.392 143.717,48.167 143.675,48.195 143.625,48.204 143.606,48.201 143.6,48.202 113.676,48.202 113.65,48.22 113.6,48.229 112,48.229 111.95,48.22 111.924,48.202 100.529,48.202 100.529,59.49 154.29,59.49
GND_HV on GND-Layer (split plane): 47.212,43.813 44.862,41.463 34.362,41.313 32.363,39.313 32.262,22.688 35.037,19.913 45.977,19.908 52.212,13.712 52.212,0.51 0.51,0.51 0.51,59.49 47.179,59.49
GND on GND-Layer (split plane): 154.29,0.51 60.388,0.51 60.378,13.712 48.262,25.787 39.075,25.804 37.812,27.087 37.8,34.4 39.075,35.675 48.037,35.663 52.937,40.563 52.878,59.49 56.275,59.49 56.275,44.2 72.53,44.2 72.53,59.49 154.29,59.49

## Keep-outs
Keep-Out Layer:
  the board outline again, w0.7

## Other copper
Top Layer:
  pour cut-out: 52.5,-0.65 52.5,13.225 46.05,19.675 35.075,19.675 32.3,22.45 32.403,39.4 34.228,41.225 44.9,41.225 47.25,43.575 47.175,61.45 52.8,61.45 52.8,40.166 48.075,35.441 39.116,35.441 37.841,34.166 37.841,26.842 39.116,25.567 48.3,25.567 60.225,13.642 60.225,-0.65
  pour cut-out: 56.275,60.4 72.538,60.4 72.538,44.2 56.275,44.2
  pour cut-out: 110.858,28.462 111.48,29.084 113.289,30.894 113.734,31.28 112.277,32.652 109.506,29.881
Bottom Layer:
  pour cut-out: 52.475,-0.65 52.475,13.251 46.015,19.67 35.075,19.675 32.3,22.45 32.3,39.275 34.25,41.225 44.9,41.225 47.25,43.575 47.175,61.45 52.75,61.45 52.75,40.1 48.075,35.425 39.112,35.437 37.837,34.162 37.85,26.85 39.112,25.567 48.3,25.55 60.194,13.695 60.205,-0.65
  pour cut-out: 56.275,44.2 56.275,60.4 72.538,60.4 72.538,44.2
GND-Layer (plane layer: these items are gaps in the copper):
  pour cut-out: 52.212,-0.412 52.212,13.712 45.977,19.908 35.037,19.913 32.262,22.688 32.363,39.313 34.362,41.313 44.862,41.463 47.212,43.813 47.175,61.475 52.872,61.475 52.937,40.563 48.037,35.663 39.075,35.675 37.8,34.4 37.812,27.087 39.075,25.804 48.262,25.787 60.378,13.712 60.389,-0.412
  pour cut-out: 56.275,44.2 56.275,60.455 62.225,60.455 66.075,60.455 70.1,60.455 72.53,60.455 72.53,44.2
PWR-Layer (plane layer: these items are gaps in the copper):
  pour cut-out: 52.338,-0.625 52.338,13.5 46.137,19.7 35.162,19.7 32.387,22.475 32.387,39.3 34.337,41.25 44.987,41.25 47.337,43.6 47.175,61.475 52.872,61.475 53.056,40.356 48.162,35.462 39.2,35.462 37.937,34.2 37.937,26.838 39.2,25.575 48.387,25.575 60.513,13.45 60.513,-0.625
  pour cut-out: 56.275,44.2 56.275,60.463 72.538,60.463 72.538,44.2
  lines w0.2: 77.4,60 77.4,56.6 79.9,54.1 82.825,54.1 92.075,54.1 96.275,49.9 96.275,48.075 ; 79.1,9.775 79.1,4.35 81.3,2.15 96.3,2.15 96.825,2.675 96.825,6.025 95.85,7 83,7 81.8,8.2 ; 81.8,16.9 81.8,25.125 80.225,26.7 79.1,26.7 79.1,30.35 80.7,31.95 86.325,31.95 87.4,33.025 90.375,36 90.375,48.075 ; 100.4,48.1 143.6,48.1
  lines w0.254: 79.1,9.775 79.1,26.7 ; 81.8,8.2 81.8,16.95 ; 81.8,16.9 85.9,16.9 87.2,18.2 97.3,18.2 101.3,18.2 106.4,13.1 113.3,13.1 123.8,23.6 132.2,32 135.2,32 138.6,28.6 138.6,19.9 140.5,18 147.4,18 ; 90.375,48.075 96.275,48.075 ; 100.4,48.1 100.4,60 ; 112,48.1 113.6,48.1 ; 123.9,0 123.9,5 126.1,7.2 146.4,7.2 150.6,11.4 154.8,11.4 ; 143.625,48.075 147.4,44.3 147.4,18 ; 155.1,20 153.7,20 152.7,19 152.7,15.1 148.5,15.1 147.4,16.2 147.4,18

## Silkscreen, mask and mechanical layers (free items; w line width, h text height)
Top Overlay:
  drawing of 57 lines, arcs and shapes, not listed
  text "TS" at 64.338,57.492 h1.5
  text "GND" at 150.225,57.1 h1.5
  text "USER LED" at 92.4,49.384 h1.5
  text "LV" at 73.142,46.962 h1.5 r270
  text "PCC" at 54.575,39.1 h2
  text "Power source" at 144.05,37.092 h1.5
  text "PreCharging" at 79.93,36.675 h1.5
  text "USB" at 144,34.884 h1.5
  text "+24V" at 144,32.7 h1.5
  text "3V3" at 150.475,29.972 h1.5
  text "LV" at 51.017,28.873 h3 r90
  text "RESET" at 93.617,28.325 h1.5 r270
  text "USER SWITCH" at 103.034,27.637 h1.5 r270
  text "Nothing is hotter than this resistor, except, of course, for Alex' sister" at 1.85,26.787 h0.7
  text "5V USB" at 150.175,24.454 h1.5
  text "TS" at 24.248,22.508 h3
  text "BMS" at 113.06,14.745 h2
  text "5V" at 150.962,14.35 h1.5
  text "24V" at 150.8,10.433 h1.5
  text "HV_5V" at 12.825,0.863 h1.5
  text "HV_GND" at 27.55,0.875 h1.5
Bottom Overlay:
  drawing of 131 lines, arcs and shapes, not listed
  text "-" at 62.1,54.975 h3
  text "GND" at 150.8,54.45 h2
  text "TPL" at 67.575,51.9 h2.5
  text "TS" at 67.516,49.779 h1.5
  text "+" at 62.425,48.89 h3
  text "\"If only this PCB could manage my sleep schedule\"" at 152.644,48.226 h1.5
  text "TSAC-" at 19.267,47.701 h2 r270
  text "TS-" at 14.842,47.426 h2 r270
  text "LV" at 68.487,41.892 h1.5
  text "PCC" at 58.85,36.95 h2
  text "Year" at 128.27,36.726 h2
  text "Rev." at 122.725,36.621 h2
  text "BMS Master" at 141.325,36.621 h2
  text "PC_Mech_State" at 54.904,34.493 h0.8
  text "5v0" at 64.304,34.468 h0.8
  text "V1.0" at 122.874,33.471 h2
  text "2024" at 128.326,33.421 h2
  text "Bram Bremer / Arjan Blankestijn" at 143.862,32.4 h2
  text "GND" at 56.854,31.493 h0.8
  text "GND" at 64.179,31.418 h0.8
  text "V2.0" at 123.048,29.022 h2
  text "2025" at 128.277,28.872 h2
  text "TS" at 31.294,28.634 h3
  text "LV" at 45.894,28.584 h3
  text "AIR_Intent_State" at 66.079,28.543 h0.8
  text "PC_Intent_State" at 54.854,28.443 h0.8
  text "Diego Rooijackers / Alex van Buuren" at 144.294,27.925 h2
  text "3V3" at 150.975,27.8 h2
  text "AIR_LOW" at 55.954,25.443 h0.8
  text "AIR_LOW" at 64.954,25.293 h0.8
  text "5V USB" at 151,22.125 h2
  text "BMS" at 117.26,14.745 h2
  text "5V" at 150.875,12.15 h2
  text "24v0" at 120.143,10.2 h1 r270
  text "Relay-" at 114.033,10.15 h1 r270
  text "Relay+" at 117.033,10.15 h1 r270
  text "GND" at 108.068,9.825 h1 r270
  text "3v3" at 111.043,9.7 h1 r270
  text "24V" at 151.075,8.2 h2
  text "GND" at 120.168,1.6 h1 r270
  text "CAN-" at 117.118,1.5 h1 r270
  text "CAN+" at 114.043,1.375 h1 r270
  text "Aux_1" at 107.893,1.275 h1 r270
  text "AUX_0" at 110.768,1.15 h1 r270
Mechanical 1:
  lines w0.254: 74.8,0 154.8,0 154.8,60 74.8,60 74.8,0

## Dimensions
72.575,53.15 to 67.95,49 on Bottom Overlay
60.575,53.65 to 56.287,59.238 on Bottom Overlay
64.783,44.146 to 67.95,49 on Bottom Overlay
58.252,6.392 to 54.601,6.275 on Bottom Overlay
60.375,1.375 to 52.25,0.51 on Bottom Overlay
39.125,35.425 to 34.25,41.225 on Bottom Overlay
37.862,26.862 to 32.308,27.083 on Bottom Overlay
52.95,46.875 to 47.183,43.508 on Bottom Overlay
56.275,44.2 to 60.721,48.966 on Top Overlay
56.275,44.2 to 67.975,48.999 on Top Overlay
47.3,43.6 to 52.875,40.2 on Top Overlay
32.35,22.475 to 37.9,26.875 on Top Overlay
52.3,13.5 to 60.475,13.45 on Top Overlay

## Text inside footprints (layer, text, board x,y; h text height)
LED2: Top Overlay "+" at 95.337,48.44 h0.5 r90
SW2: Top Overlay "ON" at 104.325,7.575 h0.89 r180; Top Component Outline "ON" at 104.325,7.575 h0.89 r180
SW3: Top Overlay "ON" at 107.55,21.16 h0.89 r180; Top Component Outline "ON" at 107.55,21.16 h0.89 r180